# Altium PCB XiaoZhi.pcbdoc (part 3 of 3)
Units mm, origin at the board's own origin, x right, y up, seen from the top; angles counter-clockwise.
Board outline 82.34 x 112.32 mm, 2 copper layers (Top Layer, Bottom Layer); 165 components, 129 nets, 592 pads, 327 vias.
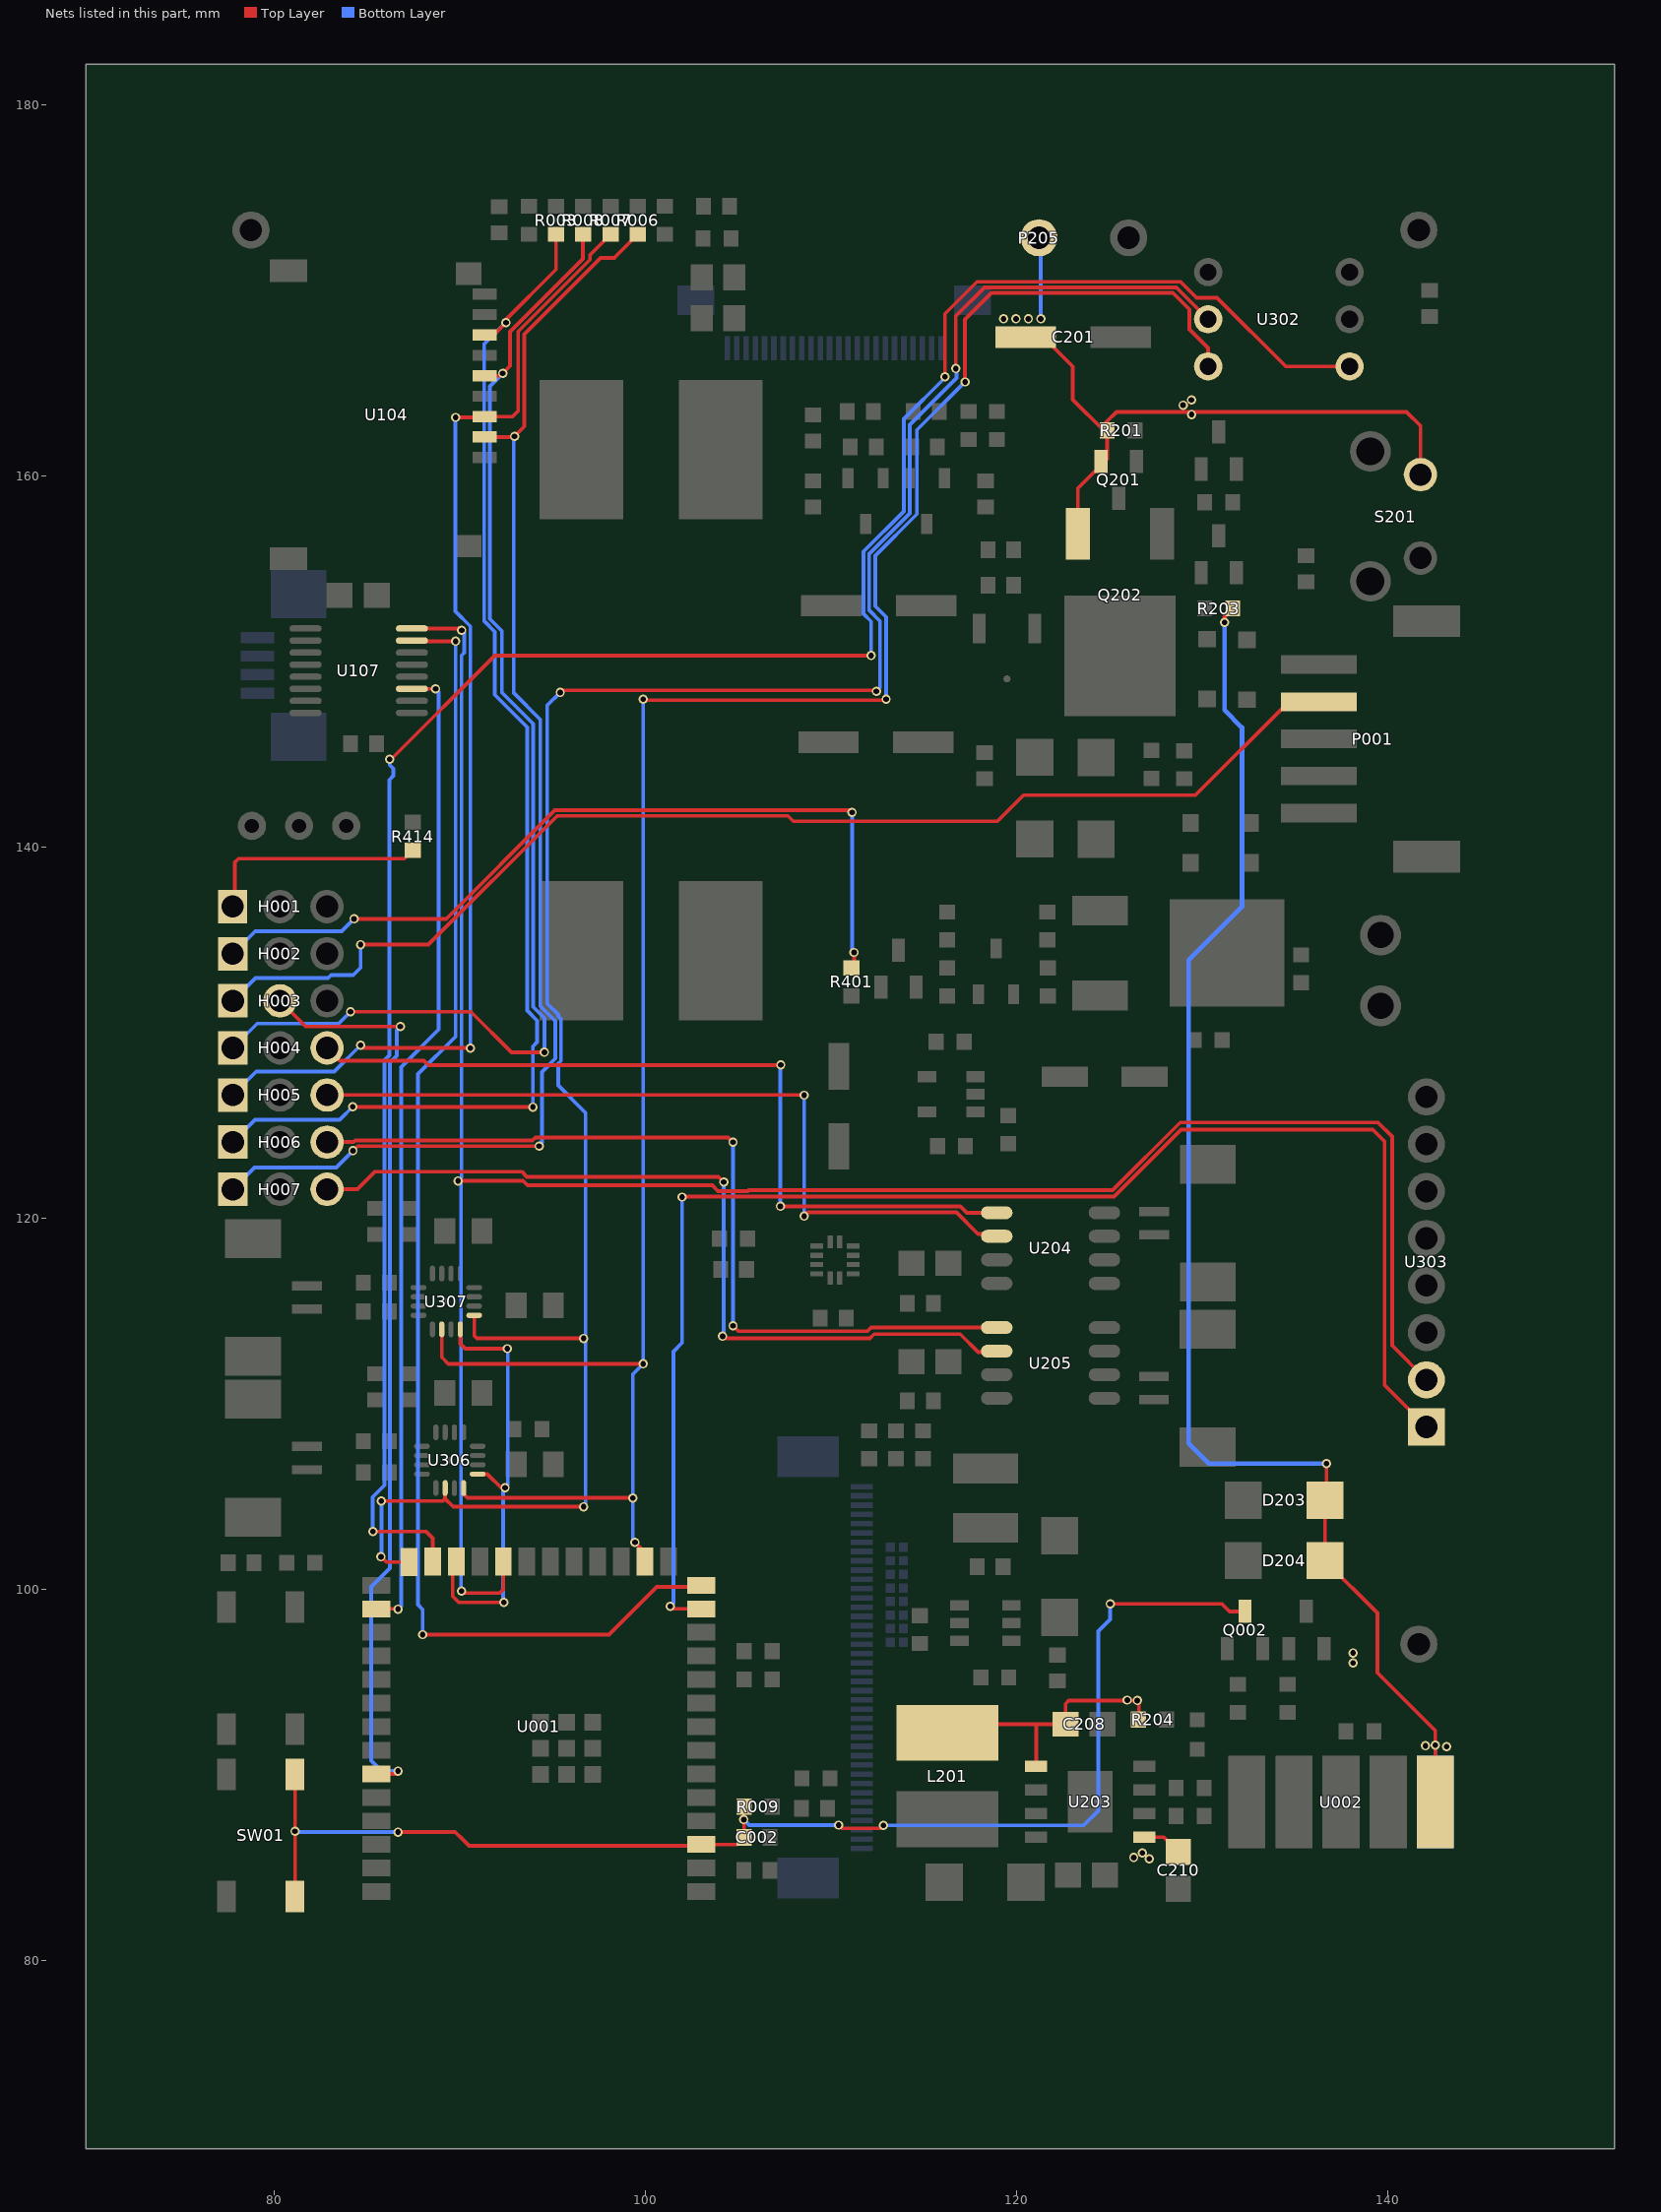
[diagram p3: the nets of this part, all layers, seen from the top]

## Via types
v1: diameter 0.5, hole 0.305, Top Layer to Bottom Layer, 327 vias

## Nets (pads, with @x,y where several pads share a name; then routed paths per layer and width w, separated by ;. In a path a pad name is that pad's centre, name@x,y a point inside that pad or via, vN(x,y) a via of type N, cw(c..) or ccw(c..) an arc to the next point about the centre after c; other vN are vias at no path point) (continued)
GPIO14: U001.22 U107.16 U303.2 | length 124.9
  Top Layer w0.2: U107.16@87.412,151.766 89.993,151.766 v1(90.09,151.669) ; v1(89.9,122) 93.397,122 93.637,121.76 103.59,121.76 103.898,121.452 105.512,121.452 105.558,121.498 125.156,121.498 128.808,125.15 139.46,125.15 140.22,124.39 140.22,113.132 U303.2@142.072,111.28 ; v1(90.079,99.89) 90.179,99.79 92.14,99.79 92.338,99.988 U001.22@92.338,101.49
  Bottom Layer w0.2: v1(90.079,99.89) 90.06,99.909 90.06,121.84 v1(89.9,122) 90.078,122.178 90.078,150.318 90.23,150.47 90.23,151.529 v1(90.09,151.669)
GPIO19: U001.13 U303.1 | length 80
  Top Layer w0.2: v1(101.326,99.07) 101.456,98.94 U001.13@102.993,98.94 ; v1(101.97,121.13) 101.99,121.15 125.235,121.15 128.845,124.76 139.18,124.76 139.81,124.13 139.81,111.002 U303.1@142.072,108.74
  Bottom Layer w0.2: v1(101.326,99.07) 101.494,99.238 101.494,112.795 101.97,113.271 v1(101.97,121.13)
GPIO20: U001.14 U107.15 | length 72.9
  Top Layer w0.2: U107.15@87.412,151.116 87.452,151.076 v1(89.76,151.076) ; v1(87.99,97.55) 98.03,97.55 100.6,100.12 102.903,100.12 U001.14@102.993,100.21
  Bottom Layer w0.2: v1(87.99,97.55) 87.99,98.91 87.74,99.16 87.74,127.76 89.76,129.78 v1(89.76,151.076)
GPIO35: U001.28 U107.11 | length 53
  Top Layer w0.2: U001.28@85.493,98.94 86.652,98.94 v1(86.666,98.926) ; U107.11@87.412,148.516 88.68,148.516 v1(88.686,148.51)
  Bottom Layer w0.2: v1(86.666,98.926) 86.834,99.094 86.834,128.135 88.854,130.155 88.854,148.342 v1(88.686,148.51)
GPIO42: H003.2 U001.35 | length 50.2
  Top Layer w0.2: H003.2@80.3,131.704 81.684,130.32 v1(86.784,130.32) ; U001.35@85.493,90.05 86.516,90.05 v1(86.666,90.2)
  Bottom Layer w0.2: v1(86.666,90.2) 85.78,90.2 85.218,90.762 85.218,100.118 86.23,101.13 86.23,128.386 86.59,128.746 86.59,130.126 v1(86.784,130.32)
GPIO45: U001.26 U302.5 U306.14 U307.1 | length 123.3
  Top Layer w0.2: v1(85.744,101.746) 86.03,101.46 U001.26@87.258,101.46 ; v1(85.76,104.75) 89.08,104.75 89.201,104.871 ; U306.14@89.201,105.449 89.201,104.871 ; U307.1@90.768,114.755 90.768,113.653 90.91,113.51 v1(96.66,113.51) ; v1(95.4,148.32) 95.52,148.44 112.411,148.44 112.435,148.416 v1(112.435,148.38) ; v1(96.66,104.44) 89.632,104.44 89.201,104.871 ; v1(116.71,165.77) 116.71,168.6 118.258,170.148 128.592,170.148 U302.5@130.31,168.43
  Bottom Layer w0.2: v1(85.744,101.746) 85.774,101.776 85.774,104.736 v1(85.76,104.75) ; v1(95.4,148.32) 94.7,147.62 94.7,131.56 95.29,130.97 95.29,130.887 95.442,130.735 95.442,128.465 95.29,128.313 95.29,127.146 96.77,125.666 v1@96.77,113.45 ; v1(96.66,104.44) 96.77,104.55 v1@96.77,113.45 ; v1(96.66,113.51) 96.71,113.51 v1@96.77,113.45 ; v1(112.435,148.38) 112.63,148.575 112.63,152.16 112.05,152.74 112.05,155.79 114.23,157.97 114.23,162.75 116.75,165.27 116.75,165.73 v1(116.71,165.77)
GPIO46: U001.16 U302.6 U306.16 U307.14 | length 121.4
  Top Layer w0.2: U307.14@89.018,114.003 89.018,112.493 89.37,112.14 v1(99.868,112.14) ; U306.16@90.199,105.449 90.199,105.121 90.399,104.921 99.301,104.921 v1(99.312,104.91) ; v1(99.428,102.518) 99.958,101.988 U001.16@99.958,101.49 ; v1(99.868,147.96) 99.918,147.91 112.91,147.91 v1(112.96,147.96) ; v1(117.21,165.053) 117.21,168.42 118.636,169.846 128.414,169.846 129.296,168.964 129.296,167.894 130.31,166.88 U302.6@130.31,165.89
  Bottom Layer w0.2: v1(99.428,102.518) 99.312,102.634 v1(99.312,104.91) 99.312,111.584 v1(99.868,112.14) v1(99.868,147.96) ; v1(112.96,147.96) 112.96,152.39 112.38,152.97 112.38,155.69 114.62,157.93 114.62,162.463 v1(117.21,165.053)
GPIO47: U001.24 U306.1 U307.16 | length 23.8
  Top Layer w0.2: U001.24@89.798,101.49 89.609,101.301 89.609,99.621 89.94,99.29 92.355,99.29 v1(92.357,99.293) ; U307.16@90.016,114.003 90.016,113.224 90.28,112.96 v1(92.544,112.96) ; U306.1@90.951,106.201 91.479,106.201 92.21,105.47 v1(92.43,105.47)
  Bottom Layer w0.2: v1(92.357,99.293) 92.32,99.33 92.32,105.36 v1(92.43,105.47) 92.57,105.61 92.57,112.934 v1(92.544,112.96)
GPIO48: U001.25 U302.1 | length 119.9
  Top Layer w0.2: v1(85.304,103.1) 88.18,103.1 88.528,102.752 U001.25@88.528,101.49 ; v1(86.209,144.721) 86.286,144.721 91.875,150.31 v1(112.15,150.31) ; v1(116.13,165.33) 116.13,168.73 117.85,170.45 128.82,170.45 129.68,169.59 130.79,169.59 134.49,165.89 U302.1@137.93,165.89
  Bottom Layer w0.2: v1(85.304,103.1) 85.29,103.114 85.29,104.959 85.928,105.597 85.928,128.511 86.19,128.773 86.19,143.61 86.408,143.828 86.408,144.217 86.209,144.416 v1(86.209,144.721) ; v1(112.15,150.31) 112.15,152.15 111.74,152.56 111.74,155.91 113.91,158.08 113.91,163.06 116.13,165.28 v1(116.13,165.33)
METAL_ADC: H001.1 R414.2 | length 12.3
  Top Layer w0.2: H001.1@77.755,136.781 77.87,136.897 77.87,139.16 78.07,139.36 87.003,139.36 R414.2@87.46,139.817
METAL_DEC: H002.1 R401.1 | length 45.1
  Top Layer w0.2: v1(84.29,136.12) 89.257,136.12 95.109,141.972 111.003,141.972 v1(111.123,141.853) ; R401.1@111.09,133.475 111.23,133.615 v1(111.23,134.31)
  Bottom Layer w0.2: H002.1@77.758,134.243 78.965,135.45 83.62,135.45 v1(84.29,136.12) ; v1(111.123,141.853) 111.123,134.417 v1(111.23,134.31)
MOT1_A: H004.3 U204.1 | length 44.3
  Top Layer w0.2: H004.3@82.84,129.166 83.526,128.48 88.06,128.48 88.302,128.238 107.27,128.238 v1(107.282,128.25) ; v1(107.262,120.63) 116.957,120.63 117.302,120.285 U204.1@118.919,120.285
  Bottom Layer w0.2: v1(107.262,120.63) 107.262,128.23 v1(107.282,128.25)
MOT1_B: H005.3 U204.2 | length 43.2
  Top Layer w0.2: H005.3@82.84,126.627 108.541,126.627 v1(108.548,126.62) ; v1(108.548,120.1) 108.748,120.3 116.75,120.3 117.91,119.14 118.794,119.14 U204.2@118.919,119.015
  Bottom Layer w0.2: v1(108.548,120.1) v1(108.548,126.62)
MOT2_A: H006.3 U205.1 | length 46.4
  Top Layer w0.2: H006.3@82.84,124.089 82.846,124.095 84.278,124.095 84.358,124.174 93.902,124.174 94.07,124.342 104.45,124.342 v1(104.712,124.08) ; v1(104.712,114.193) 105.007,113.898 111.958,113.898 112.155,114.095 U205.1@118.919,114.095
  Bottom Layer w0.2: v1(104.712,114.193) v1(104.712,124.08)
MOT2_B: H007.3 U205.2 | length 45.7
  Top Layer w0.2: H007.3@82.84,121.55 84.48,121.55 85.43,122.5 93.324,122.5 93.604,122.22 103.93,122.22 v1(104.21,121.94) ; v1(104.149,113.629) 104.265,113.512 112.082,113.512 112.31,113.74 116.953,113.74 117.913,112.78 118.07,112.78 118.115,112.825 U205.2@118.919,112.825
  Bottom Layer w0.2: v1(104.149,113.629) 104.21,113.69 v1(104.21,121.94)
PRINTER_DTR: H003.1 P001.4 | length 66.2
  Top Layer w0.2: v1(84.646,134.73) 88.294,134.73 95.234,141.67 107.67,141.67 107.96,141.38 118.957,141.38 120.367,142.79 129.62,142.79 134.649,147.819 P001.4@136.279,147.819
  Bottom Layer w0.2: H003.1@77.76,131.704 78.986,132.93 82.896,132.93 83.056,133.09 84.25,133.09 84.646,133.486 v1(84.646,134.73)
SD_CLK/SCK: H004.1 R008.2 U104.5 | length 66.9
  Top Layer w0.2: v1(84.1,131.11) 90.587,131.11 92.767,128.93 v1(94.55,128.93) ; U104.5@91.317,165.386 92.176,165.386 v1(92.3,165.51) 92.7,165.91 92.7,167.761 96.627,171.688 R008.2@96.627,173.011
  Bottom Layer w0.2: H004.1@77.76,129.166 79.075,130.48 83.47,130.48 v1(84.1,131.11) ; v1(92.3,165.51) 91.61,164.82 91.61,152.28 92.26,151.63 92.26,148.31 93.94,146.63 93.94,131.38 94.55,130.77 v1(94.55,128.93)
SD_CMD/MOSI: H005.1 R007.2 U104.3 | length 63.4
  Top Layer w0.2: v1(84.646,129.31) 84.788,129.168 90.55,129.168 v1(90.56,129.158) ; v1(89.76,163.14) 91.271,163.14 U104.3@91.317,163.186 92.826,163.186 93.132,163.492 93.132,167.766 97.01,171.644 97.01,171.897 R007.2@98.123,173.011
  Bottom Layer w0.2: H005.1@77.76,126.627 79.023,127.89 83.226,127.89 v1(84.646,129.31) ; v1(89.76,163.14) 89.75,163.13 89.75,152.693 90.56,151.883 v1(90.56,129.158)
SD_D0/MISO: H006.1 R003.2 U104.7 | length 68.5
  Top Layer w0.2: v1(84.22,126) 84.24,125.98 v1(93.934,125.98) ; U104.7@91.317,167.586 91.816,167.586 v1@92.37,168.14 ; v1(92.48,168.25) v1@92.37,168.14 ; R003.2@95.172,173.011 95.172,171.112 92.37,168.31 v1@92.37,168.14
  Bottom Layer w0.2: H006.1@77.76,124.089 78.962,125.29 83.51,125.29 v1(84.22,126) ; v1(92.48,168.25) 92.45,168.25 91.308,167.108 91.308,152.155 91.87,151.593 91.87,148.2 93.62,146.45 93.62,131.174 94.158,130.636 94.158,129.479 93.934,129.255 v1(93.934,125.98)
SD_D3/CS: H007.1 R006.2 U104.2 | length 72.8
  Top Layer w0.2: v1(84.235,123.625) 84.483,123.872 v1(94.265,123.872) ; U104.2@91.317,162.086 v1@92.974,162.086 ; v1(92.94,162.12) 93.47,162.65 93.47,167.63 97.578,171.738 98.33,171.738 ; 98.318,171.75 R006.2@99.579,173.011
  Bottom Layer w0.2: H007.1@77.76,121.55 78.93,122.72 83.331,122.72 v1(84.235,123.625) ; v1(92.94,162.12) 92.9,162.08 92.9,148.29 94.33,146.86 94.33,131.42 95.14,130.61 95.14,128.59 94.42,127.87 94.42,124.027 v1(94.265,123.872)
SYS_RESET: C002.1 Q002.3 R009.1 SW01.1 SW01.2 U001.3 | length 71.5
  Top Layer w0.2: v1(81.11,86.95) v1@81.113,86.95 ; SW01.2@81.113,83.428 v1@81.113,86.95 ; SW01.1@81.113,90.028 v1@81.113,86.95 ; v1(86.666,86.91) 89.743,86.91 89.979,86.674 89.983,86.674 90.487,86.17 102.923,86.17 U001.3@102.993,86.24 104.919,86.24 C002.1@105.305,86.626 105.308,86.628 v1@105.308,87.563 ; v1(105.29,87.58) v1@105.308,87.563 ; R009.1@105.308,88.277 v1@105.308,87.563 ; v1(110.396,87.287) 110.573,87.11 112.66,87.11 v1(112.82,87.27) ; v1(125.03,99.21) 131.05,99.21 131.458,98.802 Q002.3@132.298,98.802
  Bottom Layer w0.2: v1(81.11,86.95) 81.15,86.91 v1(86.666,86.91) ; v1(105.29,87.58) 105.584,87.287 v1(110.396,87.287) ; v1(112.82,87.27) 123.6,87.27 124.39,88.06 124.39,97.73 125.03,98.37 v1(125.03,99.21)
VBIN: C201.1 C210.1 P205.1 Q201.2 Q202.3 R201.2 S201.2 U203.5 | length 41.1
  Top Layer w0.2: C201.1@120.485,167.47 121.43,167.47 123.01,165.89 123.01,164.1 124.665,162.445 R201.2@124.866,162.445 ; Q202.3@123.29,156.868 123.29,159.33 124.866,160.906 R201.2@124.866,162.445 ; U203.5@126.862,86.636 127.918,86.636 C210.1@128.706,85.848 ; v1@128.89,163.83 129.11,163.83 v1@129.14,163.8 ; S201.2@141.749,160.06 141.749,162.691 141,163.44 125.37,163.44 124.82,162.89 124.82,162.491 R201.2@124.866,162.445
  Bottom Layer w0.2: P205.1@121.193,172.82 121.29,172.723 v1@121.29,168.47
  other v1: 127.14,85.47 126.3,85.54 126.76,85.79 129.42,163.299 128.957,163.8 129.41,164.09 119.29,168.45 119.957,168.45 120.623,168.45 121.29,168.45
VUSB: C208.1 D203.2 D204.2 L201.2 R203.2 R204.2 U002.1 U002.10 U203.1 | length 93.4
  Top Layer w0.2: L201.2@116.26,92.253 116.729,92.722 121.031,92.722 ; U203.1@121.045,90.446 121.045,92.707 121.031,92.722 ; R204.2@126.556,92.976 126.58,93 126.58,93.91 v1(126.49,94) 122.8,94 122.626,93.826 C208.1@122.626,92.722 121.031,92.722 ; v1(136.69,106.77) 136.69,104.872 D203.2@136.61,104.792 D204.2@136.61,101.536 139.43,98.715 139.43,95.49 142.549,92.371 v1(142.55,91.59) U002.1@142.549,88.531
  Top Layer w0.254: v1(131.19,152.09) 131.19,152.404 R203.2@131.632,152.846
  Bottom Layer w0.2: U002.10@142.549,88.531 v1(142.55,91.59)
  Bottom Layer w0.254: v1(131.19,152.09) 131.19,147.37 132.13,146.43 132.13,136.77 129.26,133.9 129.26,107.85 130.34,106.77 v1(136.69,106.77)
  other v1: 143.15,91.52 142.02,91.56 125.95,94.02 138.12,96.03 138.12,96.562
pads on no net: P201.1 P203.1 P204.1 U101.1 U101.23 U101.24 U104.9 U105.1 U105.2 U105.3 U105.4 U105.8 U105.12 U105.13 U105.14 U107.7 U107.8 U107.13 U301.5 U301.6 U301.10 U303.5 U306.5 U306.6 U306.12 U306.13 U307.5 U307.6 U307.12 U307.13

## Polygon pours and split planes (outlines as drawn)
VUSB on Top Layer (solid, remove dead copper, pour order 0): 23 vertices, not listed, extent 113.52,90.15 126.97,94.33
VBIN on Bottom Layer (solid, remove dead copper, pour order 172): 119,168.14 119,173.86 122.17,173.86 122.24,173.79 122.24,168.15 122.22,168.13 119.01,168.13
$4N4778 on Top Layer (solid, remove dead copper, pour order 2): 20 vertices, not listed, extent 113.5,83.18 121.68,89.12
$4N4759 on Top Layer (solid, remove dead copper, pour order 4): 120.44,86.19 119.49,85.24 119.49,83.21 119.5,83.2 123.39,83.2 123.43,83.24 123.43,85.275 121.725,85.275 121.65,85.35 121.65,86.95 121.64,86.96 120.44,86.96
GND on Top Layer (solid, remove dead copper, pour order 6): 33 vertices, not listed, extent 120.44,83.13 130.48,93.414
$4N7783 on Top Layer (solid, remove dead copper, pour order 8): 17 vertices, not listed, extent 123.83,111.17 128.19,114.5
$4N7788 on Top Layer (solid, remove dead copper, pour order 10): 123.82,111.9 123.82,110.01 123.91,109.92 128.18,109.92 128.21,109.95 128.21,110.46 128.18,110.49 125.7,110.49 125.65,110.54 125.65,111.82 125.56,111.91 123.83,111.91
$4N7778 on Top Layer (solid, remove dead copper, pour order 12): 123.85,116.07 125.63,116.07 125.65,116.09 125.65,117.38 125.77,117.5 126.9,117.5 128.2,118.8 128.2,119.34 128.19,119.35 126.59,119.35 126.58,119.36 126.58,118.24 126.49,118.15 123.89,118.15 123.85,118.11
$4N7774 on Top Layer (solid, remove dead copper, pour order 14): 123.86,120.66 123.86,118.65 123.87,118.64 125.6,118.64 125.61,118.65 125.61,119.96 125.7,120.05 128.22,120.05 128.24,120.07 128.24,120.66
GND on Top Layer (solid, remove dead copper, pour order 16): 21 vertices, not listed, extent 114.34,97.88 118.51,101.69
$2N9566 on Top Layer (solid, remove dead copper, pour order 18): 117.4,98.84 116.23,98.84 116.19,98.88 116.19,104.11 116.17,104.13 123.412,104.13 123.412,101.912 123.31,101.81 121.17,101.81 120.51,102.47 117.14,102.47 117,102.33 117,99.8 117.4,99.4
$2N5674 on Top Layer (solid, remove dead copper, pour order 20): 120.093,98.282 120.091,98.28 120.09,98.28 120.092,98.282
$2N5674 on Top Layer (solid, remove dead copper, pour order 22): 119.2,97.89 120.9,97.89 121.29,97.5 121.29,96.15 121.39,96.05 123.317,96.05 123.317,99.473 123.31,99.48 121.305,99.48 121.305,98.605 121.142,98.442 119.204,98.442 119.204,97.894
+5V on Top Layer (solid, remove dead copper, pour order 24): 118.85,101.67 118.85,98.84 118.87,98.82 120.21,98.82 120.23,98.84 120.23,101.57 120.13,101.67
$6N908 on Top Layer (solid, remove dead copper, pour order 26): 130.67,129.16 138.92,129.16 140.78,131.02 140.78,133.08 140.8,133.1 131.66,133.1 130.64,132.08 130.64,129.19
$6N914 on Top Layer (solid, remove dead copper, pour order 28): 50 vertices, not listed, extent 114.46,131.49 140.64,141.73
$6N906 on Top Layer (solid, remove dead copper, pour order 30): 20 vertices, not listed, extent 121.2,133.04 126,137.378
$6N909 on Top Layer (solid, remove dead copper, pour order 32): 25 vertices, not listed, extent 125.57,126.99 141.79,141.86
$6N910 on Top Layer (solid, remove dead copper, pour order 34): 25 vertices, not listed, extent 109.81,122.54 120.02,126.02
$6N914 on Top Layer (solid, remove dead copper, pour order 36): 109.83,129.45 109.83,126.87 109.85,126.85 112.31,126.85 113.73,125.43 114.62,125.43 114.912,125.138 114.912,123.421 116.111,123.421 116.18,123.49 116.18,125.82 115.99,126.01 114.42,126.01 110.98,129.45
$6N916 on Top Layer (solid, remove dead copper, pour order 38): 116.76,129.93 116.76,127.53 116.97,127.32 119.81,127.32 120.06,127.07 123.84,127.07 123.84,128.202 118.338,128.202 118.23,128.31 118.23,129.8 118.1,129.93
VUSB on Top Layer (solid, remove dead copper, pour order 40): 18 vertices, not listed, extent 135.6,90.41 143.55,105.84
+5V on Top Layer (solid, remove dead copper, pour order 42): 24 vertices, not listed, extent 116.45,98.82 133.25,107.35
VBIN on Top Layer (solid, remove dead copper, pour order 44): 19 vertices, not listed, extent 118.85,155.43 125.28,168.74
+12V on Top Layer (solid, remove dead copper, pour order 46): 33 vertices, not listed, extent 122.55,143.78 138.322,159.44
+12V on Top Layer (solid, remove dead copper, pour order 48): 101.8,157.72 106.09,153.43 106.09,153.39 107.19,153.39 108.24,152.34 111.654,152.34 111.74,152.426 111.74,153.812 112.389,154.46 116.84,154.46 116.84,155.81 116.71,155.94 107.95,155.94 106.12,157.77 101.85,157.77
+12V on Bottom Layer (solid, remove dead copper, pour order 174): 115.847,155.94 115.847,154.424 115.87,154.4 126.04,154.4 126.15,154.51 126.15,155.92 126.12,155.95 115.857,155.95
+3V3 on Top Layer (solid, remove dead copper, pour order 50): 101.45,174.93 88.655,174.93 88.243,174.518 88.243,164.268 88.53,163.98 91.96,163.98 91.96,164.57 91.99,164.6 89.42,164.6 89.16,164.86 89.16,173.59 89.66,174.09 101.46,174.09 101.47,174.08 101.47,174.91
+3V3 on Top Layer (solid, remove dead copper, pour order 52): 25 vertices, not listed, extent 102.72,167.75 111.26,174.97
GND on Top Layer (solid, remove dead copper, pour order 54): 19 vertices, not listed, extent 108.57,158.676 113.13,163.91
+3V3 on Top Layer (solid, remove dead copper, pour order 56): 37 vertices, not listed, extent 107.269,150.937 118.88,168.32
GND on Top Layer (solid, remove dead copper, pour order 58): 21 vertices, not listed, extent 115.33,159.34 118.78,163.92
+3V3 on Top Layer (solid, remove dead copper, pour order 60): 23 vertices, not listed, extent 82.51,145.07 88.61,165.4
+3V3 on Top Layer (solid, remove dead copper, pour order 62): 82.653,154.416 82.653,152.063 82.65,152.06 82.65,154.413
+3V3 on Top Layer (solid, remove dead copper, pour order 64): 137.15,169.24 137.15,168.03 137.52,167.66 138.42,167.66 138.95,168.19 141.378,168.19 141.619,167.949 141.69,168.02 142.71,168.02 142.85,168.16 142.85,168.98 138.63,168.98 138.37,169.24
GND on Top Layer (solid, remove dead copper, pour order 66): 24 vertices, not listed, extent 131.44,138.57 143.91,156.14
GND on Top Layer (solid, remove dead copper, pour order 68): 131.45,159.7 139.18,159.7 140.25,160.77 140.25,162.39 140.21,162.43 138.37,162.43 137.01,161.07 131.47,161.07 131.45,161.05
+12V on Top Layer (solid, remove dead copper, pour order 70): 17 vertices, not listed, extent 115.11,114.935 119.77,118.26
+12V on Top Layer (solid, remove dead copper, pour order 72): 115.61,112.92 115.61,111.18 115.11,110.68 115.11,109.7 115.13,109.68 119.69,109.68 119.76,109.75 119.76,110.62 119.75,110.63 117.24,110.63 117.03,110.84 117.03,112.95 115.64,112.95
+12V on Bottom Layer (solid, remove dead copper, pour order 176): 120.55,154.67 120.55,114.62 120.61,114.56 121.59,114.56 121.59,154.86 121.36,155.09 120.97,155.09
+12V on Top Layer (solid, remove dead copper, pour order 74): 22 vertices, not listed, extent 115.2,108.64 121.74,115.564
GND on Top Layer (solid, remove dead copper, pour order 76): 123.27,167.08 123.3,167.05 123.3,166.26 124.81,164.75 128.52,164.75 128.52,168.11 127.65,168.98 123.48,168.98 123.27,168.77
GND on Bottom Layer (solid, remove dead copper, pour order 178): 123.38,168.54 123.81,168.11 128.52,168.11 128.52,175.09 128.35,175.26 123.44,175.26 123.38,175.2
GND on Top Layer (solid, remove dead copper, pour order 78): 18 vertices, not listed, extent 124.98,169.55 142.76,173.98
GND on Bottom Layer (solid, remove dead copper, pour order 180): 36 vertices, not listed, extent 100.96,165.235 128.49,175.16
GND on Top Layer (solid, remove dead copper, pour order 80): 21 vertices, not listed, extent 109.21,161.3 112.6,169.83
GND on Top Layer (solid, remove dead copper, pour order 82): 117.347,112.247 117.347,111.083 117.51,110.92 117.92,110.92 118.17,111.17 119.69,111.17 119.81,111.29 119.81,111.88 119.8,111.89 118.04,111.89 117.68,112.25 117.35,112.25
GND on Top Layer (solid, remove dead copper, pour order 84): 113.57,109.75 113.57,112.96 113.56,112.97 115.05,112.97 115.07,112.95 115.07,111.52 114.52,110.97 114.52,109.7 114.46,109.64 113.67,109.64 113.55,109.76 113.56,109.76
GND on Top Layer (solid, remove dead copper, pour order 86): 113.57,118.613 113.57,114.98 113.61,114.94 114.665,114.94 114.665,116.525 115.06,116.92 115.06,118.599 115.046,118.613
GND on Top Layer (solid, remove dead copper, pour order 88): 117.352,117.258 117.52,117.09 117.77,117.09 118.06,117.38 119.78,117.38 119.82,117.42 119.82,118.08 119.79,118.11 118.14,118.11 118.01,118.24 117.352,118.24
GND on Bottom Layer (solid, remove dead copper, pour order 184): 21 vertices, not listed, extent 113.53,110.659 118.27,118.45
GND on Bottom Layer (solid, remove dead copper, pour order 182): 113.54,117.11 113.54,117.08 113.57,117.05 113.57,117.08
GND on Bottom Layer (solid, remove dead copper, pour order 186): 34 vertices, not listed, extent 117.309,110.66 127.33,166.08
GND on Top Layer (solid, remove dead copper, pour order 90): 134.22,142.33 134.22,141.33 134.23,141.32 138.31,141.32 140.69,138.94 141.32,138.94 141.49,139.11 141.49,143.2 140.37,143.2 139.5,142.33
+3V3 on Top Layer (solid, remove dead copper, pour order 92): 25 vertices, not listed, extent 87.37,143.76 118.325,151.26
VUSB on Bottom Layer (solid, remove dead copper, pour order 188): 125.72,94.47 125.72,93.88 125.86,93.74 126.97,93.74 127.01,93.7 131.178,93.7 131.588,94.11 136.62,94.11 138.4,95.89 138.4,96.82 138.39,96.83 138.02,96.83 135.95,94.76 131.33,94.76 131.04,94.47
$6N914 on Top Layer (solid, remove dead copper, pour order 94): 17 vertices, not listed, extent 109.83,129.15 120.17,132.253
GND on Top Layer (solid, remove dead copper, pour order 96): 128.77,124 128.77,106.61 131.74,106.61 131.79,106.56 131.79,124.01 128.78,124.01
GND on Top Layer (solid, remove dead copper, pour order 98): 29 vertices, not listed, extent 113.14,124.96 125.99,132.81
GND on Bottom Layer (solid, remove dead copper, pour order 190): 113.15,131.81 113.15,127.74 113.26,127.63 113.711,127.63 113.861,127.78 113.89,127.78 113.89,131.77 113.93,131.81
GND on Top Layer (solid, remove dead copper, pour order 100): 114.83,131.06 114.95,131.18 114.95,133.06 114.94,133.07 114.19,133.07 114.15,133.03 114.15,131.95 114.01,131.81 113.18,131.81 113.14,131.77 113.14,131.11 113.19,131.06
GND on Bottom Layer (solid, remove dead copper, pour order 192): 21 vertices, not listed, extent 122.76,130.28 128.5,165.84
VBIN on Top Layer (solid, remove dead copper, pour order 102): 126.04,86.94 126.04,85.25 126.16,85.13 129.261,85.13 129.337,85.206 129.337,86.883 129.27,86.95 126.05,86.95
VBIN on Top Layer (solid, remove dead copper, pour order 104): 123.62,164.35 129.61,164.35 130.07,163.89 130.07,162.97 127.06,162.97 126.92,163.11 125.27,163.11 125.15,162.99 124.98,162.99
VBIN on Bottom Layer (solid, remove dead copper, pour order 194): 32 vertices, not listed, extent 124.75,85.19 129.69,164.36
VUSB on Bottom Layer (solid, remove dead copper, pour order 196): 141.541,90.381 141.541,91.931 141.55,91.94 143.55,91.94 143.56,91.93 143.56,90.89 143.051,90.381
GND on Top Layer (solid, remove dead copper, pour order 106): 135.6,96.156 135.266,96.156 135.15,96.04 135.15,95.75 135.23,95.67 135.23,92.66 136.47,91.42 136.47,91 138.47,91 138.47,91.52 138.37,91.62 137.38,91.62 136.51,92.49 136.51,95.9 135.856,95.9
+5V on Top Layer (solid, remove dead copper, pour order 110): 103.06,139.49 103.06,138.27 102.82,138.03 105.219,138.03 105.219,138.131 105.07,138.28 105.07,139.49 103.06,139.49
+5V on Top Layer (solid, remove dead copper, pour order 112): 111.46,146.23 111.43,146.2 103.11,146.2 103.11,145.11 103.19,145.03 111.44,145.03 111.49,145.08 111.49,146.2
+5V on Bottom Layer (solid, remove dead copper, pour order 198): 103.14,145.92 103.14,138.59 104.87,138.59 105,138.72 105,144.91 105.3,145.21 105.3,145.92
+5V on Top Layer (solid, remove dead copper, pour order 114): 90.61,118.6 92.3,118.6 92.37,118.67 92.41,118.67 92.41,120 92.35,120.06 90.65,120.06 90.61,120.02
+5V on Top Layer (solid, remove dead copper, pour order 116): 90.61,111.86 90.61,109.86 91.74,109.86 91.75,109.87 91.75,111.86
+5V on Bottom Layer (solid, remove dead copper, pour order 200): 20 vertices, not listed, extent 90.61,111.25 92.8,146.32
+5V on Top Layer (solid, remove dead copper, pour order 118): 103.34,146.21 103.33,146.2 91.42,146.2 91.42,145.3 91.55,145.17 93.04,145.17 93.25,145.38 102.94,145.38 103.19,145.13 103.34,145.28
+5V on Top Layer (solid, remove dead copper, pour order 120): 26 vertices, not listed, extent 109.76,142.332 122.02,148.28
+5V on Bottom Layer (solid, remove dead copper, pour order 202): 26 vertices, not listed, extent 110.71,105.55 116.61,145.14
+5V on Top Layer (solid, remove dead copper, pour order 122): 117.572,105.6 116.4,105.6 116.35,105.55 115.48,105.55 115.37,105.66 115.37,106.17 115.56,106.36 115.56,107.15 115.73,107.32 116.7,107.32 117.572,106.448
GND on Top Layer (solid, remove dead copper, pour order 124): 22 vertices, not listed, extent 89.48,166.19 92.57,173.5
GND on Top Layer (solid, remove dead copper, pour order 126): 19 vertices, not listed, extent 76.62,154.88 81.85,171.65
GND on Bottom Layer (solid, remove dead copper, pour order 204): 26 vertices, not listed, extent 79.77,140.33 86.82,155.02
GND on Top Layer (solid, remove dead copper, pour order 128): 24 vertices, not listed, extent 84.76,152.85 103.66,170.66
GND on Top Layer (solid, remove dead copper, pour order 130): 76.62,155.31 76.62,152.59 76.88,152.33 81.85,152.33 81.85,155.14 81.68,155.31
GND on Bottom Layer (solid, remove dead copper, pour order 206): 81.993,154.997 76.717,154.997 76.64,154.92 76.64,152.52 76.81,152.35 80.2,152.35 80.22,152.33 81.993,154.103
GND on Bottom Layer (solid, remove dead copper, pour order 208): 89.6,171.99 96.84,171.99 96.86,172.01 97.804,172.01 98.123,172.329 100.221,172.329 101.1,171.45 101.1,173.41 101.323,173.764 101.18,173.93 89.693,173.93 89.527,173.764 89.527,172.063
GND on Top Layer (solid, remove dead copper, pour order 132): 82.46,148.516 82.614,148.516 83.69,147.44 83.69,145.1 84.48,145.1 84.48,148.45 84.23,148.7 82.644,148.7
GND on Bottom Layer (solid, remove dead copper, pour order 210): 94.74,121.05 94.74,105.7 94.82,105.62 95.72,105.62 95.85,105.75 95.85,120.93 95.73,121.05
GND on Top Layer (solid, remove dead copper, pour order 134): 28 vertices, not listed, extent 76.4,82.61 88.92,119.95
GND on Top Layer (solid, remove dead copper, pour order 136): 22 vertices, not listed, extent 80.11,114.007 95.91,120.93
GND on Top Layer (solid, remove dead copper, pour order 138): 94.49,105.77 94.56,105.7 95.84,105.7 95.91,105.77 95.91,108.08 94.8,108.08 94.61,107.89 94.5,107.89 94.49,107.88
GND on Bottom Layer (solid, remove dead copper, pour order 212): 88.11,121.11 88.11,104.9 88.26,104.75 89.79,104.75 89.82,104.72 89.82,121.08 89.78,121.12 88.12,121.12
$3N1782 on Top Layer (solid, remove dead copper, pour order 140): 85.022,119.533 87.953,119.533 88.46,120.04 89.71,120.04 89.78,119.97 89.78,118.61 89.75,118.58 85.078,118.58 85.022,118.636
$3N1786 on Top Layer (solid, remove dead copper, pour order 142): 84.84,110.64 87.88,110.64 88.54,111.3 89.78,111.3 89.8,111.28 89.8,109.82 89.74,109.76 84.84,109.76
GND on Top Layer (solid, remove dead copper, pour order 144): 93.83,93.28 93.83,89.6 93.88,89.55 97.65,89.55 97.68,89.58 97.68,93.28
GND on Bottom Layer (solid, remove dead copper, pour order 214): 33 vertices, not listed, extent 127.531,120.39 143.33,175.26
GND on Bottom Layer (solid, remove dead copper, pour order 216): 34 vertices, not listed, extent 129.6,94.98 138.53,161.31
GND on Bottom Layer (solid, remove dead copper, pour order 218): 118.23,166.57 118.23,165.83 118.15,165.67 118.15,165.3 116.53,163.68 116.53,160.42 116.66,160.29 117.81,160.29 118.09,160.57 118.09,163.93 119.584,165.424 118.437,166.57
GND on Bottom Layer (solid, remove dead copper, pour order 220): 21 vertices, not listed, extent 113.81,143.38 121.27,165.881
GND on Bottom Layer (solid, remove dead copper, pour order 222): 128.05,145.62 129.34,145.62 129.55,145.83 129.55,150.23 130.7,151.38 130.7,157.23 134.574,161.104 134.574,161.47 130.01,161.47 129.69,161.15 129.69,152.22 128.08,150.61 128.08,146.48 128.05,146.45
GND on Bottom Layer (solid, remove dead copper, pour order 224): 18 vertices, not listed, extent 127.75,160.37 137.31,172.43
GND on Bottom Layer (solid, remove dead copper, pour order 226): 30 vertices, not listed, extent 76.85,83 110.428,90.03
GND on Bottom Layer (solid, remove dead copper, pour order 228): 18 vertices, not listed, extent 107.09,103.74 110.854,118.442
GND on Bottom Layer (solid, remove dead copper, pour order 230): 100.87,92.13 100.87,91.39 100.89,91.37 105.47,91.37 106.24,92.14 106.24,93 106.09,93.15 105.74,93.15 104.76,92.17 100.91,92.17
GND on Bottom Layer (solid, remove dead copper, pour order 232): 112.08,93.32 114.44,93.32 114.86,93.74 114.86,99.04 115.01,99.19 115.01,102.55 114.96,102.6 113.61,102.6 113.58,102.63 113.58,94.14 113.33,93.89 112.513,93.89 112.08,93.457
GND on Bottom Layer (solid, remove dead copper, pour order 234): 117.62,98.69 117.62,97.3 118.08,96.84 119.81,96.84 120.27,96.38 120.27,91.32 121.48,90.11 123.82,90.11 123.82,90.98 121.84,92.96 121.84,98.69
GND on Bottom Layer (solid, remove dead copper, pour order 236): 98.06,117.98 98.06,129.72 96.32,131.46 96.32,172.02 95.84,172.5 96.75,173.41 99.7,173.41 99.7,172.7 98.58,171.58 98.58,119.76 98.78,119.56 98.78,118 98.76,117.98
GND on Top Layer (solid, remove dead copper, pour order 146): 99.02,130.49 93.9,130.49 93.55,130.84 93.55,138.44 95.06,139.95 98.764,139.95 98.984,139.73 98.984,130.666 99.03,130.62 99.02,130.61
GND on Top Layer (solid, remove dead copper, pour order 148): 41 vertices, not listed, extent 95.03,114.07 109.88,120.37
GND on Top Layer (solid, remove dead copper, pour order 150): 113.13,151.46 112.88,151.71 112.88,153.57 113.12,153.81 117.02,153.81 117.02,151.53 116.95,151.46
GND on Top Layer (solid, remove dead copper, pour order 152): 109.77,109.13 109.77,108.27 109.9,108.14 115.47,108.14 115.49,108.16 115.49,108.86 115.43,108.92 110.64,108.92 110.4,109.16 110.4,109.18 110.35,109.13
GND on Top Layer (solid, remove dead copper, pour order 154): 106.3,87.1 106.3,84.41 106.32,84.39 108.52,84.39 108.75,84.62 108.75,87.61 108.83,87.69 108.83,88.63 108.8,88.66 107.43,88.66 107.39,88.62 107.39,87.59 106.9,87.1
CAM_RESET on Top Layer (solid, remove dead copper, pour order 156): 20 vertices, not listed, extent 78.5,91.565 84.94,101.88
SYS_RESET on Top Layer (solid, remove dead copper, pour order 158): 80.6,90.88 80.6,82.6 80.66,82.54 81.62,82.54 81.64,82.56 81.64,90.88 81.62,90.9 80.62,90.9
GND on Top Layer (solid, remove dead copper, pour order 160): 119.35,157.54 119.35,153.64 120.54,152.45 120.54,150.84 121.29,150.84 121.38,150.93 121.38,153.326 120.605,154.101 120.605,157.565 120.58,157.59 119.4,157.59
GND on Top Layer (solid, remove dead copper, pour order 162): 104.1,174.01 119.273,174.01 119.786,174.523 124.167,174.523 125.24,173.45 127.89,173.45 128.33,173.89 128.71,173.89 128.77,173.95 127.73,174.99 104.09,174.99 104.09,174.02
GND on Top Layer (solid, remove dead copper, pour order 164): 113.09,146.29 113.09,144.82 114.72,143.19 118.75,143.19 118.75,144.09 118.77,144.11 116.917,144.11 116.665,144.362 116.665,146.255 116.63,146.29
GND on Top Layer (solid, remove dead copper, pour order 166): 82.96,83.13 83.01,83.08 103.71,83.08 103.74,83.11 103.74,84.11 103.8,84.17 82.96,84.17
GND on Top Layer (solid, remove dead copper, pour order 168): 93.71,93.34 93.71,89.64 93.92,89.43 98.43,89.43 98.47,89.47 98.47,91.11 98.85,91.49 101.18,91.49 101.44,91.75 101.44,92.07 101.35,92.16 98.8,92.16 97.68,93.28 93.77,93.28
GND on Top Layer (solid, remove dead copper, pour order 170): 120.75,94.53 122.69,94.53 123.01,94.85 123.01,95.4 122.93,95.48 120.77,95.48 120.75,95.46
GND on Top Layer (solid, remove dead copper, pour order 172): 114.27,104.49 114.27,98.03 114.4,97.9 115.44,97.9 115.47,97.93 115.47,104.39 115.35,104.51 115.33,104.49

## Keep-outs
Board Outline Layer:
  lines w0.254: 76.2,82.181 76.2,175.78 144.2,175.78 144.2,85.233 130.865,85.233 130.865,82.181 76.2,82.181

## Other copper
Top Layer:
  drawing of 800 lines, arcs and shapes, not listed
Bottom Layer:
  drawing of 239 lines, arcs and shapes, not listed

## Silkscreen, mask and mechanical layers (free items; w line width, h text height)
Top Silkscreen Layer:
  region: 106.2,175.58 114.2,175.58 114.2,167.58 106.2,167.58
  text "B-" at 127.95,172.77 h3.05
  text "B+" at 116.05,172.68 h3.05
  text "BAT" at 88.77,135.8 h2
  text "MET" at 84.69,135.77 h2
  text "MET" at 84.55,133.28 h2
  text "CAM" at 88.63,133.14 h2
  text "CAM" at 88.7,130.87 h2
  text "PRT" at 84.55,130.8 h2
  text "SD" at 84.83,125.76 h2
  text "MOT" at 88.77,125.66 h2
  text "BOOT" at 82.92,96.7 h1.2 r270
  text "RESET" at 83.08,88.01 h1.2 r270

## Text inside footprints (layer, text, board x,y; h text height)
U201: Top Silkscreen Layer "VIN" at 102.339,157.336 h3.05 r270; Top Silkscreen Layer "+5V" at 101.958,144.001 h3.05 r270; Top Silkscreen Layer "GND" at 94.592,157.336 h3.05 r270; Top Silkscreen Layer "GND" at 94.719,143.62 h3.05 r270
U302: Top Silkscreen Layer "SD" at 134.755,165.001 h1.5; Top Silkscreen Layer "V+" at 134.755,167.668 h1.5; Top Silkscreen Layer "V-" at 134.755,170.208 h1.5; Top Silkscreen Layer "LR" at 132.54,170.208 h1.5; Top Silkscreen Layer "WS" at 132.215,167.541 h1.5; Top Silkscreen Layer "SCK" at 131.453,165.001 h1.5